# Altium PCB external battery charger (w button) main board PCB.PcbDoc
Units mm, origin at the board's own origin, x right, y up, seen from the top; angles counter-clockwise.
Board outline 44.32 x 24.89 mm, 2 copper layers (Top Layer, Bottom Layer); 11 components, 7 nets, 36 pads, 5 vias.
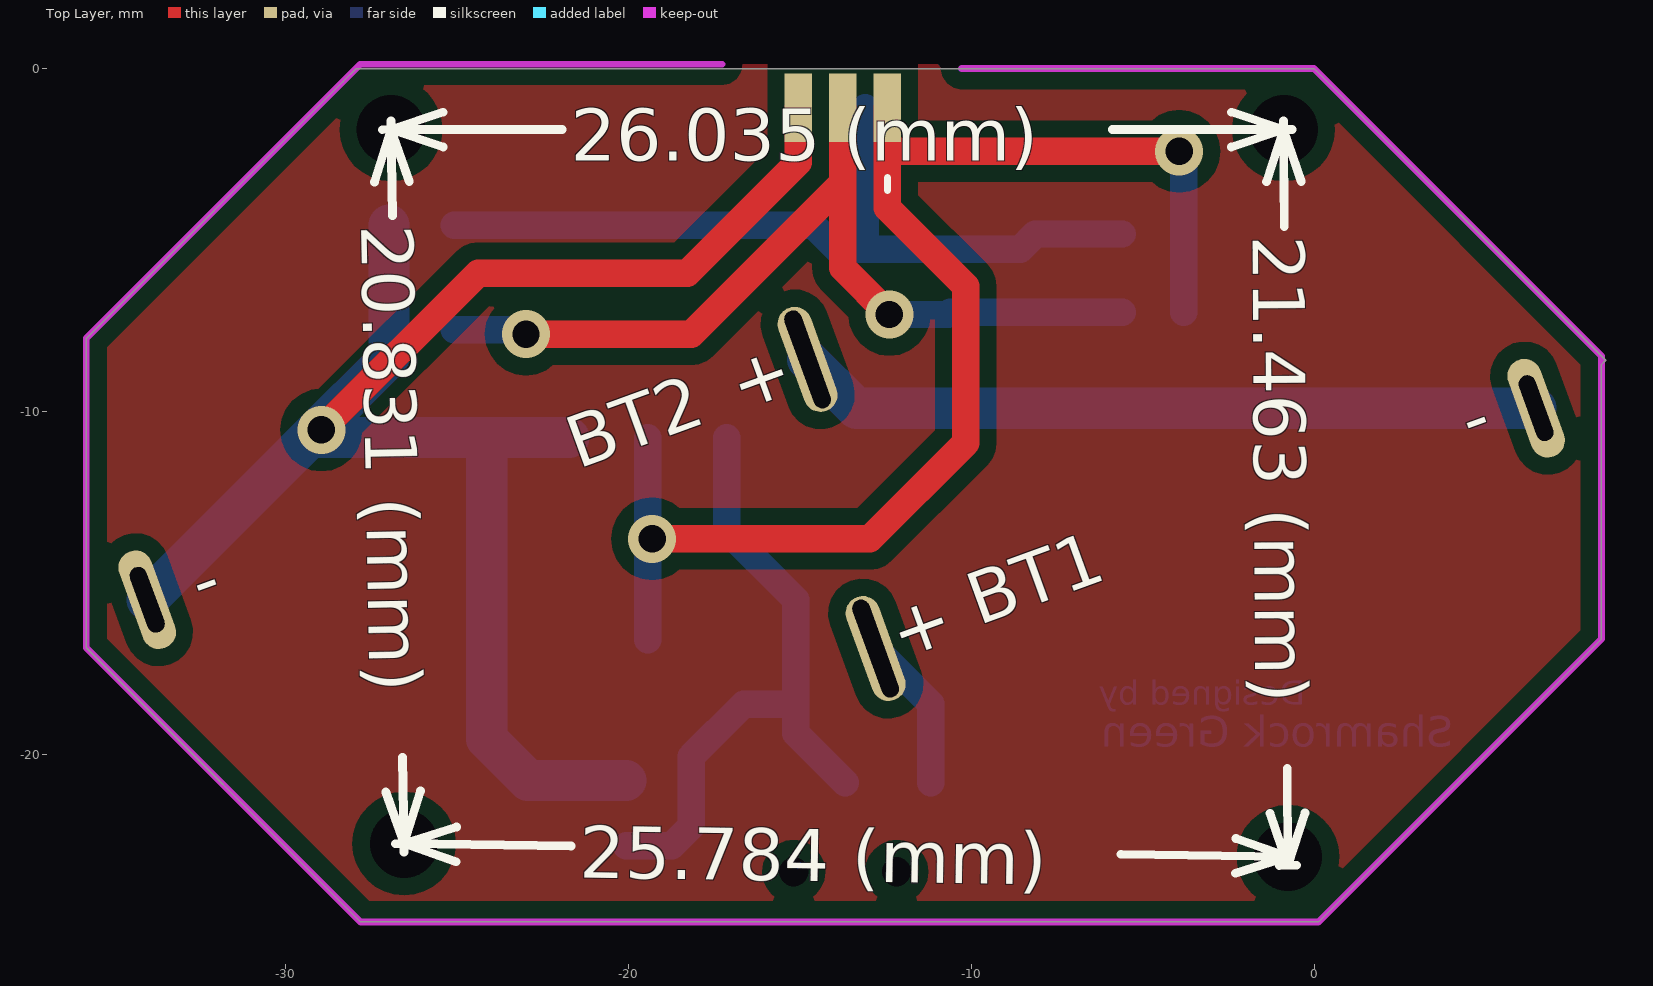
[diagram p0: Top Layer view]
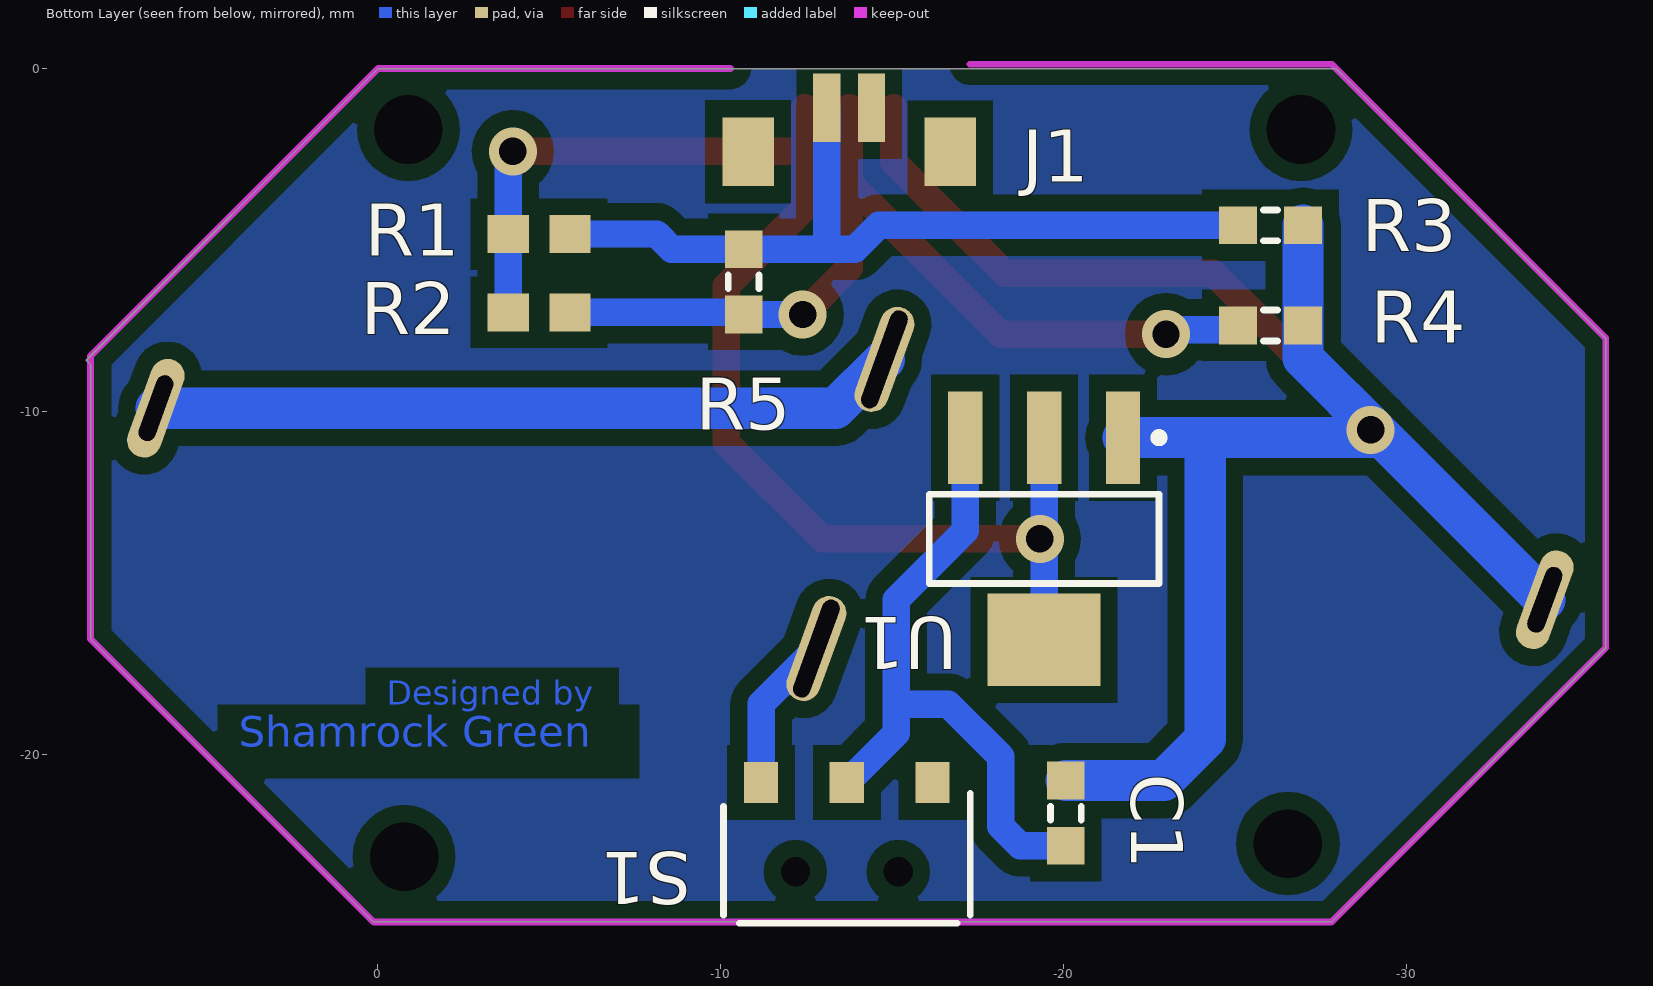
[diagram p1: Bottom Layer view, seen from below]

## Layer stack, top to bottom
Top Layer: signal copper 0.0356
Dielectric: dielectric 0.32, FR-4, Dk 4.8
Bottom Layer: signal copper 0.0356

## Board outline
-27.94,0 0,0 8.509,-8.509 8.382,-8.636 8.382,-16.637 0.127,-24.892 -27.813,-24.892 -35.814,-16.891 -35.814,-7.874 -28.321,-0.381

## Design rules (kind name [scope] priority, off if disabled: settings)
Clearance [All] p1: gap=0.5
HoleSize [All] p1: absolutevalues=TRUE maxlimit=3 minlimit=0.5 maxpercent=80.000 minpercent=20.000
PolygonConnect [All] p1: connectstyle=Relief reliefconductorwidth=0.254 reliefentries=4 polygonreliefangle="90 Angle" airgapwidth=0.254
RoutingVias [All] p1: holewidth=0.711 width=1.27 viastyle="Through Hole" minholewidth=0.711 minwidth=1.27 maxholewidth=0.711 maxwidth=1.27
SilkToSolderMaskClearance SilkscreenOverComponentPads [IsPad] p1: minsilkscreentomaskgap=0.254 clearancetoexposedcopper=TRUE
SolderMaskExpansion [All] p1: expansion=0.102
Width [All] p1: maxlimit=2 minlimit=0.4 preferedwidth=0.8
26 further rules are at their usual default settings.

## Components (designator, comment, footprint, x,y, rotation, side; value= is the part's Value field where it differs from the comment)
BT1 "Battery" PCBComponent_1 6.477,-9.906 r200 top
BT2 "Battery" PCBComponent_1 -34.036,-15.494 r20 top
C1 "Cap Semi" RESC1608M -20.066,-21.717 r270 bottom
J1 "USB micro" usb-microB-plug -12.446,-1.143 r90 bottom
R1 "" CAPC1608M -4.699,-4.826 r0 bottom
R2 "Res3" CAPC1608M -4.699,-7.112 r0 bottom
R3 "R3" RESC1608M -26.035,-4.572 r0 bottom
R4 "Res3" RESC1608M -26.035,-7.493 r0 bottom
R5 "Res3" RESC1608M -10.668,-6.223 r270 bottom
S1 "SPDT switch" "SPDT SWITCH SMD" -11.176,-20.828 r180 bottom
U1 "Component_1" SOT223-4M -19.431,-13.716 r270 bottom

## Footprints (in the part's own frame and the unit in brackets; to place one, negate y for a bottom-side part, rotate by r counter-clockwise, add the part's x,y. Pads: shape width x height; smd on the part's side, far side on the other; paste and mask are expansions set on the pad)
CAPC1608M [mm] "Chip Capacitor, Body 1.6x0.8mm, IPC Low Density"
  rect 1.2x1.1 smd: 1(-0.9,0) 2(0.9,0)
  body extent -0.87,-0.48 0.87,0.48, height 0.85
PCBComponent_1 [mm]
  oval 1x3.2 hole 0.5 slot 3 at 90 deg mask+0.08: 1(20.5,0)
  oval 1x3 hole 0.5 slot 2 at 90 deg mask+0.08: 2(0,0)
RESC1608M [mm] "Chip Resistor, Body 1.6x0.8mm, IPC Low Density"
  rect 1.1x1.1 smd: 1(-0.95,0) 2(0.95,0)
  silkscreen extent -0.2,-0.45 0.2,0.45, body extent -0.85,-0.48 0.85,0.48, height 0.6
SOT223-4M [mm] "SOT223, 4-Leads, Body 6.5x3.5mm, Pitch 2.3mm, Lead Span 7mm, IPC Low Density"
  rect 2.7x1 smd: 1(-2.95,2.3) 2(-2.95,0) 3(-2.95,-2.3)
  rect 2.7x3.3 smd: 5(2.95,0)
  silkscreen extent -3.07,-3.35 1.3,3.47, body extent -1.85,-3.35 1.85,3.35, height 1.8
"SPDT SWITCH SMD" [mm]
  round 0 hole 0.85 mask+0.08: 0(1,-2.6) 0(4,-2.6)
  rect 1x1.2 smd mask+0.08: 1(0,0) 2(2.5,0) 3(5,0)
  silkscreen extent -1.1,-4.1 6.1,-0.31
usb-microB-plug [mm]
  rect 2x0.8 smd far side mask+0.08: 1(0,0) 3(0,-1.3) 5(0,-2.6)
  rect 2x0.8 smd mask+0.08: 2(0,-0.65) 4(0,-1.95)
  rect 2x1.5 smd mask+0.08: GND(-1.284,-4.25) GND(-1.284,1.65)

## Part data
BT1 BT2: "Multicell Battery"
C1: "Capacitor (Semiconductor SIM Model)"
R1 R3: library part Res3, "Resistor"
R2 R4 R5: "Resistor"

## Free pads (board coordinates)
  round 0 hole 2 mask+0.08: 0(-26.924,-1.778) 1(-26.543,-22.606) 2(-0.889,-1.778) 3(-0.762,-22.987)

## Via types
v1: diameter 1.4, hole 0.8, Top Layer to Bottom Layer, 5 vias

## Nets (pads, with @x,y where several pads share a name; then routed paths per layer and width w, separated by ;. In a path a pad name is that pad's centre, name@x,y a point inside that pad or via, vN(x,y) a via of type N, cw(c..) or ccw(c..) an arc to the next point about the centre after c; other vN are vias at no path point)
GND: BT2.2 C1.1 J1.5 R3.1 R4.1 U1.1 | length 53.5
  Top Layer w0.8: v1(-28.956,-10.541) -24.384,-5.969 -18.288,-5.969 -15.046,-2.727 J1.5
  Bottom Layer w1.2: BT2.2 v1@-29.308,-10.766 ; R3.1 R4.1 -26.985,-8.443 v1@-29.308,-10.766 ; U1.1 -24.13,-10.766 ; C1.1 -22.921,-20.767 -24.13,-19.558 -24.13,-10.766 ; v1@-29.308,-10.766 -24.13,-10.766
NetBT1_1: BT1.1 S1.1 | length 4.6
  Bottom Layer w0.8: BT1.1 -11.176,-18.528 S1.1
NetBT1_2: BT1.2 BT2.1 | length 21.8
  Bottom Layer w1.2: BT2.1 -13.349,-9.906 BT1.2
NetC1_2: C1.2 S1.2 U1.3 | length 19.3
  Bottom Layer w0.8: C1.2 -18.73,-22.667 -18.161,-22.098 -18.161,-20.066 -16.637,-18.542 -15.113,-18.542 ; U1.3 -17.131,-13.476 -15.113,-15.494 -15.113,-18.542 ; S1.2 -15.113,-19.391 -15.113,-18.542
NetJ1_1: J1.1 R1.2 R2.2 U1.2 U1.5 | length 39.7
  Top Layer w0.8: v1(-19.304,-13.716) -12.954,-13.716 -10.16,-10.922 -10.16,-6.35 -12.446,-4.064 -12.446,-2.413 ; J1.1 -12.446,-2.413 ; v1(-3.937,-2.413) -12.446,-2.413
  Bottom Layer w0.8: U1.5 v1@-19.431,-13.843 ; v1@-19.431,-13.589 U1.2 ; R2.2 R1.2 v1@-3.799,-2.551
NetJ1_2: J1.2 R1.1 R3.2 R5.1 | length 24.1
  Bottom Layer w0.8: R3.2 -14.605,-4.572 -13.904,-5.273 R5.1 -8.575,-5.273 -8.128,-4.826 R1.1 ; -13.096,-5.258 J1.2
NetJ1_3: J1.3 R2.1 R4.2 R5.2 | length 26.5
  Top Layer w0.8: v1(-22.987,-7.747) -18.161,-7.747 -13.746,-3.332 ; J1.3 -13.746,-3.332 ; v1(-12.385,-7.173) -13.746,-5.812 -13.746,-3.332
  Bottom Layer w0.8: R4.2@-25.085,-7.62 v1@-22.987,-7.62 ; v1(-12.385,-7.173) R5.2 ; R5.2@-10.607,-7.112 R2.1
pads on no net: J1.4 J1.GND S1.0 S1.3

## Polygon pours and split planes (outlines as drawn)
no net on Top Layer "Bottom Layer-No Net" (solid, pour order 2): -27.813,0.127 -0.127,0.127 8.382,-8.339 8.382,-16.552 0.127,-24.765 -27.813,-24.765 -35.814,-16.805 -35.814,-7.833 -27.813,0.127
no net on Bottom Layer "Bottom Layer-No Net" (solid, pour order 11): -27.709,0.127 -27.583,-0.001 0.024,-0.001 8.382,-8.425 8.382,-16.722 0.151,-25.019 -27.709,-25.019 -35.687,-16.977 -35.814,-16.85 -35.814,-8.17 -35.814,-8.042 -27.709,0.127

## Keep-outs
Keep-Out Layer:
  lines w0.2: -17.272,0.127 -27.813,0.127 -35.814,-7.874 -35.814,-16.891 -27.813,-24.892 0.127,-24.892 8.382,-16.637 8.382,-8.382 0,0 -10.287,0

## Other copper
Bottom Layer:
  text "Designed by" at -0.254,-18.796 h1.2
  text "Shamrock Green" at 4.064,-20.066 h1.52

## Silkscreen, mask and mechanical layers (free items; w line width, h text height)
Top Overlay:
  lines w0.254: -27.404,-3.311 -26.924,-1.778 ; -27.178,-1.783 -26.67,-1.773 ; -27.079,-21.092 -26.543,-22.606 ; -26.924,-2.032 -26.924,-1.524 ; -26.878,-4.296 -26.924,-1.778 ; -26.797,-22.611 -26.289,-22.601 ; -26.589,-20.088 -26.543,-22.606 ; -26.547,-22.86 -26.539,-22.352 ; -26.388,-3.292 -26.924,-1.778 ; -26.063,-21.073 -26.543,-22.606 ; -25.4,-2.286 -26.924,-1.778 ; -25.4,-1.27 -26.924,-1.778 ; -25.027,-23.136 -26.543,-22.606 ; -25.012,-22.121 -26.543,-22.606 ; -21.93,-1.778 -26.924,-1.778 ; -21.676,-22.678 -26.543,-22.606 ; -5.883,-1.778 -0.889,-1.778 ; -5.629,-22.915 -0.762,-22.987 ; -2.413,-2.286 -0.889,-1.778 ; -2.413,-1.27 -0.889,-1.778 ; -2.293,-23.472 -0.762,-22.987 ; -2.278,-22.457 -0.762,-22.987 ; -1.388,-3.305 -0.889,-1.778 ; -1.282,-21.72 -0.766,-23.241 ; -1.143,-1.779 -0.635,-1.777 ; -1.02,-23.242 -0.512,-23.24 ; -0.889,-2.032 -0.889,-1.524 ; -0.873,-4.613 -0.889,-1.778 ; -0.782,-20.406 -0.766,-23.241 ; -0.758,-22.733 -0.766,-23.241 ; -0.372,-3.299 -0.889,-1.778 ; -0.267,-21.714 -0.766,-23.241
  text "26.035 (mm)" at -21.676,-2.692 h1.52
  text "20.831 (mm)" at -27.787,-4.567 h1.52 r271.05
  text "21.463 (mm)" at -1.785,-4.872 h1.52 r270.33
  text "25.784 (mm)" at -21.435,-23.596 h1.52 r359.15

## Text inside footprints (layer, text, board x,y; h text height)
BT1: Top Overlay "-" at 4.904,-9.668 h1.52 r200; Top Overlay "+" at -10.849,-15.401 h1.52 r200
BT2: Top Overlay "-" at -32.463,-15.732 h1.52 r20; Top Overlay "+" at -16.71,-9.999 h1.52 r20